# EAGLE board source_eagle (EAGLE 9.6.2)
REV: A
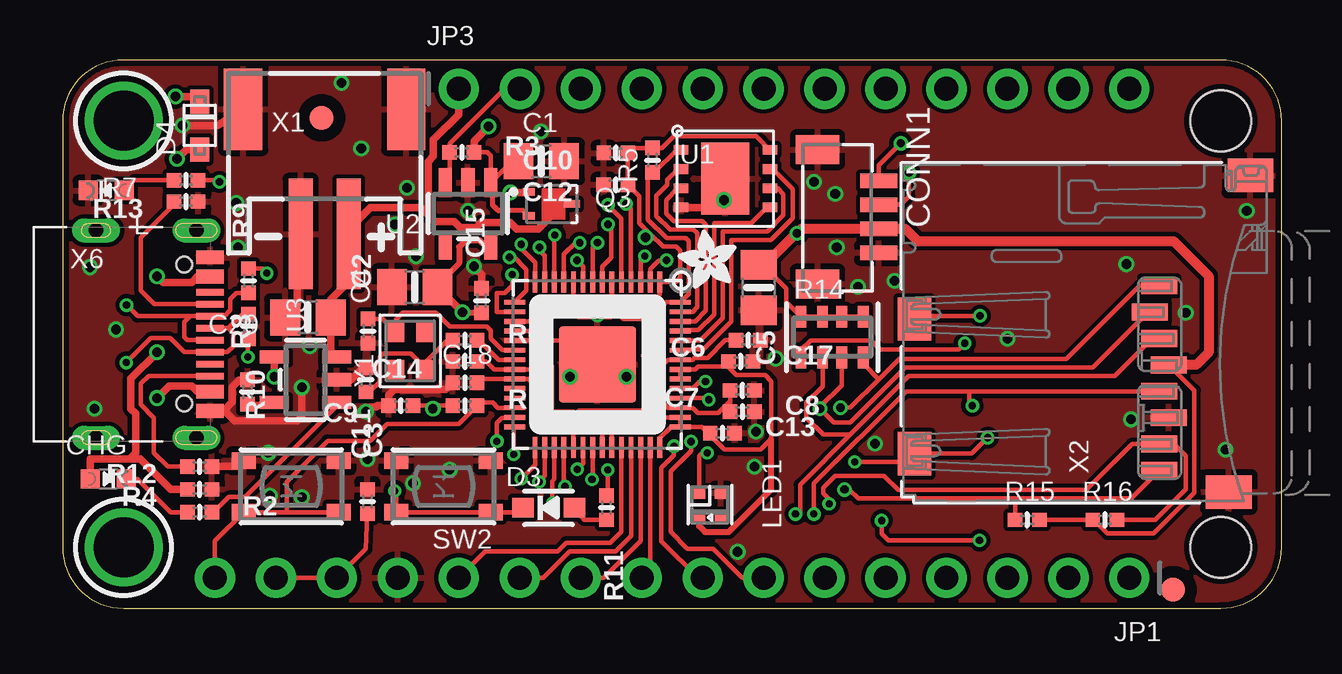
[diagram p0: board, top side]
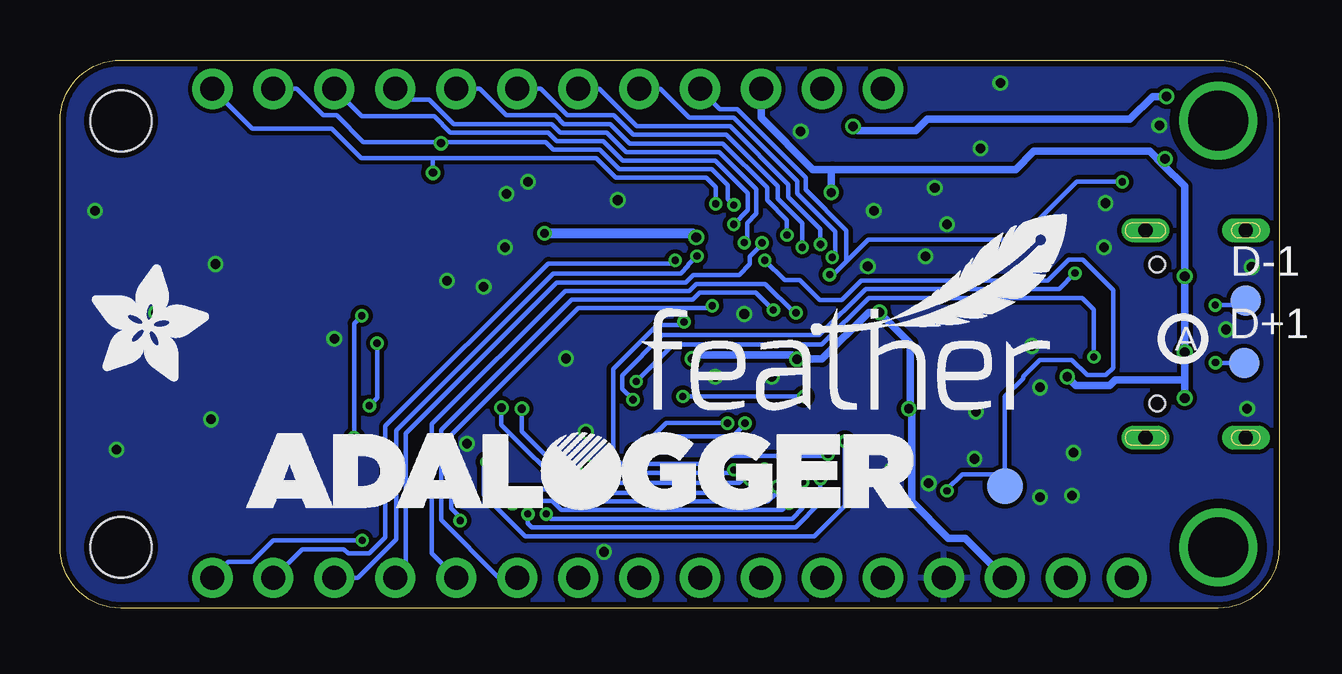
[diagram p1: board, bottom side, seen from below]

Size 50.8 x 22.86 mm. Coordinates in mm from the lower left corner, seen from the top.
Outline: 2.54,0 48.26,0 arc90 50.8,2.54 50.8,20.32 arc90 48.26,22.86 2.54,22.86 arc90 0,20.32 0,2.54 arc90 2.54,0
Copper layers (1*16): Top 0.035mm / dielectric 1.5mm / Bottom 0.035mm
Design rules "adafruit 7-7 *": minimum track width 7mil, minimum drill 8mil, track to track 7mil, track to pad 7mil, pad to pad 7mil, via to via 7mil, smd to smd 7mil, copper to edge 10mil, drill to drill 8mil, minimum pad ring 7mil, minimum via ring 5mil, stop-mask expansion 2mil, vias tented up to drill 20mil, thermal gap 10mil
Net classes: 1 power: width 0.305 mm; 2 lowpower: width 0.254 mm, drill 0.381 mm
Holes 2.54 mm at 48.26,20.32 48.26,2.54

## Footprints (pad centres in the part's own frame; a part is rotated, then mirrored left to right if it is on the bottom)
0805-NO = smd 1.24 x 1.5: 1 -0.95,0; 2 0.95,0
_0402NO = smd 0.6 x 0.6: 1 -0.508,0; 2 0.508,0
CHIPLED_0603_NOOUTLINE = smd 0.8 x 0.8: A 0,-0.75; C 0,0.75
JST_SH4_RA = smd 0.6 x 1.55: 1 1.5,0.924; 2 0.5,0.924; 3 -0.5,0.924; 4 -1.5,0.924 | smd 1.2 x 1.8: MT1 -2.8,-1.624; MT2 2.8,-1.624
SOD-323_MINI = smd 0.9 x 0.8: A 1.07,0; C -1.07,0
SOD-323F = smd 1 x 0.8: A -1,0; C 1,0
B1,27 = smd 1.27 x 1.27: TP 0,0
QFN56_7MM_REDUCEDEPAD = smd 0.875 x 0.2: 1 -3.45,2.6; 2 -3.45,2.2; 3 -3.45,1.8; 4 -3.45,1.4; 5 -3.45,1; 6 -3.45,0.6; 7 -3.45,0.2; 8 -3.45,-0.2; 9 -3.45,-0.6; 10 -3.45,-1; 11 -3.45,-1.4; 12 -3.45,-1.8; 13 -3.45,-2.2; 14 -3.45,-2.6; 29 3.45,-2.6; 30 3.45,-2.2; 31 3.45,-1.8; 32 3.45,-1.4; 33 3.45,-1; 34 3.45,-0.6; 35 3.45,-0.2; 36 3.45,0.2; 37 3.45,0.6; 38 3.45,1; 39 3.45,1.4; 40 3.45,1.8; 41 3.45,2.2; 42 3.45,2.6 | smd 0.2 x 0.875: 15 -2.6,-3.45; 16 -2.2,-3.45; 17 -1.8,-3.45; 18 -1.4,-3.45; 19 -1,-3.45; 20 -0.6,-3.45; 21 -0.2,-3.45; 22 0.2,-3.45; 23 0.6,-3.45; 24 1,-3.45; 25 1.4,-3.45; 26 1.8,-3.45; 27 2.2,-3.45; 28 2.6,-3.45; 43 2.6,3.45; 44 2.2,3.45; 45 1.8,3.45; 46 1.4,3.45; 47 1,3.45; 48 0.6,3.45; 49 0.2,3.45; 50 -0.2,3.45; 51 -0.6,3.45; 52 -1,3.45; 53 -1.4,3.45; 54 -1.8,3.45; 55 -2.2,3.45; 56 -2.6,3.45 | smd 3.2 x 3.2: P$1 0,0
1X16_ROUND = drill 1 pad 1.676: 1 -19.05,0; 2 -16.51,0; 3 -13.97,0; 4 -11.43,0; 5 -8.89,0; 6 -6.35,0; 7 -3.81,0; 8 -1.27,0; 9 1.27,0; 10 3.81,0; 11 6.35,0; 12 8.89,0; 13 11.43,0; 14 13.97,0; 15 16.51,0; 16 19.05,0
1X12_ROUND = drill 1 pad 1.676: 1 -13.97,0; 2 -11.43,0; 3 -8.89,0; 4 -6.35,0; 5 -3.81,0; 6 -1.27,0; 7 1.27,0; 8 3.81,0; 9 6.35,0; 10 8.89,0; 11 11.43,0; 12 13.97,0
SK6805_1515 = smd 0.5 x 0.5: 1 -0.5,-0.45; 2 0.5,-0.45; 3 0.5,0.45; 4 -0.5,0.45
DFN2015-3 = smd 0.5 x 0.31: 1 -0.95,0.5; 2 -0.95,-0.5 | smd 0.65 x 0.31: 3 0.825,0
RESPACK_4X0603 = smd 0.45 x 0.9: 1 -1.3,-0.85; 2 -0.4,-0.85; 3 0.4,-0.85; 4 1.3,-0.85; 5 1.3,0.85; 6 0.4,0.85; 7 -0.4,0.85; 8 -1.3,0.85
BTN_RKB2_4.6X2.8 = smd 1 x 0.7: A 1.973,1.075; A' -1.973,1.075; B 1.973,-1.075; B' -1.973,-1.075
TESTPOINT_ROUND_1.5MM_NO = smd 1.5 x 1.5: P$1 0,0
USON8_4X4 = smd 0.6 x 0.4: 1 -1.85,1.2; 2 -1.85,0.4; 3 -1.85,-0.4; 4 -1.85,-1.2; 5 1.85,-1.2; 6 1.85,-0.4; 7 1.85,0.4; 8 1.85,1.2 | smd 2 x 3: PAD 0,0
SOT23-5 = smd 0.55 x 1.2: 1 -0.95,-1.3; 2 0,-1.3; 3 0.95,-1.3; 4 0.95,1.3; 5 -0.95,1.3
MOUNTINGHOLE_2.5_PLATED = drill 2.5 pad 3.2: P$1 0,0
FIDUCIAL_1MM = smd 1 x 1: 1 0,0
JSTPH2_BATT = smd 1 x 4.6: 1 -1,-2.303; 2 1,-2.303 | smd 1.6 x 3.4: NC1 -3.4,2.897; NC2 3.4,2.897
MICROSD = smd 0.7 x 1.5: 1 1.761,-3.147; 2 0.661,-2.747; 3 -0.439,-3.147; 4 -1.539,-3.547; 5 -2.639,-3.147; 6 -3.739,-3.547; 7 -4.839,-3.147; 8 -5.939,-3.147 | smd 1.8 x 1.4: CD1 -5.239,7.053; CD2 0.38,7.053 | smd 1.4 x 1.9: MT1 -6.839,-6.047; MT2 6.361,-6.947
USB_C_CUSB31-CFM2AX-01-X = smd 0.575 x 1.15: A1B12 -3.2,2.275; A4B9 -2.4,2.275; B1A12 3.2,2.275; B4A9 2.4,2.275 | smd 0.275 x 1.15: A5 -1.25,2.275; A6 -0.25,2.275; A7 0.25,2.275; A8 1.25,2.275; B5 1.75,2.275; B6 0.75,2.275; B7 -0.75,2.275; B8 -1.75,2.275 | drill 0.6 pad 1 long: M1 -4.32,1.7; M2 4.32,1.7; M3 -4.32,-2.48; M4 4.32,-2.48 | hole 0.65: 2.89,1.2; -2.89,1.2
CRYSTAL_2.5X2 = smd 0.9 x 0.75: 1 -0.825,-0.625; 2 0.825,-0.625; 3 0.825,0.625; 4 -0.825,0.625

## Placement (x,y rotation side)
C1  10uF/16V  [0805-NO]  19.94,18.63 0 top
C2  22pF  [_0402NO]  12.73,11.56 90 top
C3  22pF  [_0402NO]  12.64,9.53 270 top
C4  10uF/16V  [0805-NO]  14.67,13.38 180 top
C5  10uF/16V  [0805-NO]  29.01,13.37 270 top
C6  0.1uF  [_0402NO]  28.57,11.18 180 top
C7  0.1uF  [_0402NO]  28.32,9.08 180 top
C8  1uF/25V  [_0402NO]  28.32,8.19 0 top
C9  0.1uF  [_0402NO]  14.1,8.45 180 top
C10  1uF/25V  [_0402NO]  23.06,18.98 180 top
C11  1uF/25V  [_0402NO]  12.7,4.45 90 top
C12  0.1uF  [_0402NO]  23.05,17.65 180 top
C13  0.1uF  [_0402NO]  27.5,7.3 0 top
C14  0.1uF  [_0402NO]  16.76,10.29 180 top
C15  1uF/25V  [_0402NO]  17.46,12.83 90 top
C17  1uF/25V  [_0402NO]  28.26,10.29 0 top
C18  0.1uF  [_0402NO]  16.76,9.4 0 top
C20  10uF/16V  [0805-NO]  10.22,12.13 180 top
CHG  ORANGE  [CHIPLED_0603_NOOUTLINE]  1.91,5.4 270 top
CONN1  STEMMA_I2C_QTRA  [JST_SH4_RA]  33.08,16.32 270 top
D3  1N5819  [SOD-323_MINI]  20.26,4.19 0 top
D4  PMEG2020AEA  [SOD-323F]  5.71,20.13 90 top
D+1  TPB1,27  [B1,27]  1.46,10.22 0 bottom
D-1  TPB1,27  [B1,27]  1.4,12.83 0 bottom
IC1  RP2040_QFN56  [QFN56_7MM_REDUCEDEPAD]  22.29,10.16 270 top
JP1  [1X16_ROUND]  25.4,1.27 180 top
JP3  [1X12_ROUND]  30.48,21.65 0 top
L  RED  [CHIPLED_0603_NOOUTLINE]  1.82,17.42 90 top
LED1  WS2812B_SK6805_1515  [SK6805_1515]  26.97,4.32 270 top
PLABEL62  [PLABEL62]  35.31,10.22 0 bottom
PLABEL63  [PLABEL63]  16.07,7.37 0 top
PLABEL64  [PLABEL64]  9.78,7.37 0 top
PLABEL65  [PLABEL65]  3.8,5.51 90 top
PLABEL66  [PLABEL66]  3.61,17.2 90 top
PLABEL67  [PLABEL67]  6.16,2.86 0 top
PLABEL68  [PLABEL68]  13.84,2.79 0 top
PLABEL69  [PLABEL69]  16.7,2.79 0 top
PLABEL70  [PLABEL70]  19.05,2.79 0 top
PLABEL71  [PLABEL71]  21.59,2.79 0 top
PLABEL72  [PLABEL72]  24.13,2.79 0 top
PLABEL73  [PLABEL73]  26.67,2.79 0 top
PLABEL74  [PLABEL74]  29.21,2.79 0 top
PLABEL75  [PLABEL75]  27.81,20.51 0 top
PLABEL76  [PLABEL76]  24.13,20.13 0 top
PLABEL77  [PLABEL77]  21.59,20.13 0 top
PLABEL78  [PLABEL78]  18.92,20.13 0 top
PLABEL79  [PLABEL79]  16.32,20.19 0 top
PLABEL80  [PLABEL80]  10.29,2.79 0 top
PLABEL81  [PLABEL81]  30.23,15.56 90 top
PLABEL82  [PLABEL82]  31.62,2.79 0 top
PLABEL83  [PLABEL83]  34.48,2.79 0 top
PLABEL84  [PLABEL84]  36.83,2.79 0 top
PLABEL85  [PLABEL85]  39.37,2.79 0 top
PLABEL86  [PLABEL86]  41.91,2.79 0 top
PLABEL87  [PLABEL87]  44.39,2.79 0 top
PLABEL88  [PLABEL88]  34.29,20.13 0 top
PLABEL89  [PLABEL89]  36.83,20.13 0 top
PLABEL90  [PLABEL90]  39.37,20.13 0 top
PLABEL91  [PLABEL91]  41.91,20.13 0 top
PLABEL92  [PLABEL92]  45.34,20.13 0 top
PLABEL93  [PLABEL93]  30.29,20.38 0 top
PLABEL94  [PLABEL94]  32.64,20.32 0 top
PLABEL95  [PLABEL95]  34.8,6.6 0 top
PLABEL96  [PLABEL96]  31.75,2.86 0 bottom
PLABEL97  [PLABEL97]  34.48,2.86 0 bottom
PLABEL98  [PLABEL98]  37.02,2.86 0 bottom
PLABEL99  [PLABEL99]  39.37,2.86 0 bottom
PLABEL100  [PLABEL100]  41.91,2.86 0 bottom
PLABEL101  [PLABEL101]  41.78,20.07 0 bottom
PLABEL102  [PLABEL102]  44.96,20.07 0 bottom
PLABEL103  [PLABEL103]  39.37,20.07 0 bottom
PLABEL104  [PLABEL104]  36.83,20.07 0 bottom
PLABEL105  [PLABEL105]  34.29,20.07 0 bottom
PLABEL106  [PLABEL106]  31.75,20.13 0 bottom
PLABEL107  [PLABEL107]  6.29,2.86 0 bottom
PLABEL108  [PLABEL108]  13.84,2.86 0 bottom
PLABEL109  [PLABEL109]  16.76,2.86 0 bottom
PLABEL110  [PLABEL110]  18.86,2.86 0 bottom
PLABEL111  [PLABEL111]  21.65,2.86 0 bottom
PLABEL112  [PLABEL112]  24.07,2.86 0 bottom
PLABEL113  [PLABEL113]  26.61,2.86 0 bottom
PLABEL114  [PLABEL114]  29.15,2.86 0 bottom
PLABEL115  [PLABEL115]  9.97,2.86 0 bottom
PLABEL116  [PLABEL116]  26.67,20.07 0 bottom
PLABEL117  [PLABEL117]  24.19,20.07 0 bottom
PLABEL118  [PLABEL118]  21.53,20.07 0 bottom
PLABEL119  [PLABEL119]  18.99,20.07 0 bottom
PLABEL120  [PLABEL120]  16.38,20.07 0 bottom
PLABEL121  [PLABEL121]  29.21,20.07 0 bottom
PLABEL122  [PLABEL122]  9.53,19.81 0 bottom
PLABEL123  [PLABEL123]  44.58,2.86 0 bottom
PLABEL124  [PLABEL124]  41.91,13.02 0 bottom
Q3  DMG3415UFY  [DFN2015-3]  20.38,16.85 0 top
R1  10K  [_0402NO]  16.76,8.45 0 top
R2  10K  [_0402NO]  5.71,4 0 top
R3  10K  [_0402NO]  16.64,19.01 0 top
R4  10K  [_0402NO]  5.71,4.95 180 top
R5  10K  [_0402NO]  24.59,18.68 90 top
R6  1K  [_0402NO]  16.76,11.18 0 top
R7  10K  [_0402NO]  5.14,17.84 180 top
R8  5.1K  [_0402NO]  7.71,9.02 90 top
R9  22 ohm  [_0402NO]  7.75,13.65 90 top
R10  22 ohm  [_0402NO]  7.75,11.75 270 top
R11  1K  [_0402NO]  22.67,4.19 270 top
R12  5.1K  [_0402NO]  5.71,5.91 180 top
R13  5.1K  [_0402NO]  5.14,16.95 180 top
R14  47K  [RESPACK_4X0603]  32.07,11.3 0 top
R15  47K  [_0402NO]  40.2,3.68 0 top
R16  47K  [_0402NO]  43.43,3.68 0 top
SW1  RKB2  [BTN_RKB2_4.6X2.8]  9.53,5.08 180 top
SW2  RKB2  [BTN_RKB2_4.6X2.8]  15.88,5.08 180 top
TP3  [TESTPOINT_ROUND_1.5MM_NO]  11.43,5.08 0 bottom
U1  8MB QSPI  [USON8_4X4]  27.62,17.91 0 top
U2  RT9080-3.3  [SOT23-5]  16.89,16.45 180 top
U3  MCP73831T-2ACI/OT  [SOT23-5]  10.12,9.53 90 top
U$13  [PCBFEAT-REV-040]  4,11.24 0 bottom
U$28  [ADALOGGER_LOGO]  43.05,4.06 0 bottom
U$31  MOUNTINGHOLE2.5  [MOUNTINGHOLE_2.5_PLATED]  2.54,20.32 270 top
U$32  MOUNTINGHOLE2.5  [MOUNTINGHOLE_2.5_PLATED]  2.54,2.54 270 top
U$34  FIDUCIAL_1MM  [FIDUCIAL_1MM]  10.79,20.45 270 top
U$35  FIDUCIAL_1MM  [FIDUCIAL_1MM]  46.28,0.77 270 top
U$43  [ADAFRUIT_2.5MM]  28.07,13.34 90 top
U$46  [FEATHERLOGO_MED]  26.67,8.19 0 bottom
U$47  [ADAFRUIT_5MM]  49.47,9.46 0 bottom
X1  JSTPH  [JSTPH2_BATT]  10.92,17.91 0 top
X2  MicroSD  [MICROSD]  42.55,11.68 90 top
X6  USB Type C  [USB_C_CUSB31-CFM2AX-01-X]  3.87,11.43 270 top
Y1  12MHz/12pF  [CRYSTAL_2.5X2]  14.48,10.73 90 top

## Library data of the parts
C1-C3 C5-C15 C17 C18 C20 D3 JP1 JP3 R1-R16 TP3 U1 U$43 U$47 Y1 = microbuilder
C4 = microbuilder; COMPANY: ADAFRUIT INDUSTRIES; DRAWN: KTOWN; REV: A
CHG L = microbuilder; ROT: 270
CONN1 = adafruit_electromech; LCSC: C145961
D4 = adafruit
D+1 D-1 = testpad
IC1 = adafruit_micro; LCSC: C2040
LED1 = microbuilder; LCSC: C2890035
PLABEL62-PLABEL124 = pinguin
Q3 = microbuilder; ROT: 180
SW1 SW2 = adafruit_electromech
U2 = adafruit_power; JLC_ROTATION: 0
U3 = microbuilder; JLC_ROTATION: 0; LCSC: C424093
U$13 = microbuilder; REV: A
U$28 = silks
U$31 U$32 = adafruit_electromech; BOM: EXCLUDE
U$34 U$35 = microbuilder; BOM: EXCLUDE
U$46 = feather_silks
X1 = adafruit_electromech; LCSC: C47647
X2 = adafruit_electromech; JLC_ROTATION: 90; LCSC: C125617
X6 = adafruit_electromech; LCSC: C165948

## Nets
1.2V: C6.2 C7.2 C8.1 C18.2 IC1.23 IC1.45 IC1.50
!RESET: IC1.26 JP1.16 R1.2 SW1.A SW1.A'
+3V3: C4.1 C5.1 C9.1 C10.1 C11.1 C12.1 C13.1 C14.1 C15.1 C17.1 CONN1.2 IC1.1 IC1.10 IC1.22 IC1.33 IC1.42 IC1.43 IC1.44 IC1.48 IC1.49 JP1.14 JP1.15 LED1.2 R1.1 R5.2 R14.5 R14.6 R14.7 R14.8 R15.2 R16.1 U1.8 U2.5 X2.4
A0: IC1.38 JP1.12
A1: IC1.39 JP1.11
A2: IC1.40 JP1.10
A3: IC1.41 JP1.9
CARD_DET: IC1.27 X2.CD1 X2.CD2
CC1: R13.2 X6.A5
CC2: R12.2 X6.B5
CMD/MOSI: IC1.30 R14.2 X2.3
D4: IC1.6 JP1.1
D5: IC1.7 JP3.10
D6: IC1.8 JP3.9
D9: IC1.12 JP3.8
D10: IC1.13 JP3.7
D11: IC1.14 JP3.6
D12: IC1.15 JP3.5
D13: IC1.16 JP3.4 R7.1
D24: IC1.36 JP1.8
D25: IC1.37 JP1.7
D+: IC1.47 R10.2
D-: IC1.46 R9.2
DAT0/MISO: IC1.31 R16.2 X2.7
DAT1: IC1.32 R15.1 X2.8
DAT2: IC1.34 R14.4 X2.1
DAT3/CS: IC1.35 R14.3 X2.2
EN: JP3.2 R3.1 U2.3
GND [power]: C1.2 C2.1 C3.1 C4.2 C5.2 C6.1 C7.1 C8.2 C9.2 C10.2 C11.2 C12.2 C13.2 C14.2 C15.2 C17.2 C18.1 C20.2 CONN1.1 CONN1.MT1 CONN1.MT2 IC1.19 IC1.P$1 JP1.13 L.C LED1.4 R4.1 R8.2 R12.1 R13.1 SW1.B SW1.B' SW2.B SW2.B' U1.4 U1.PAD U2.2 U3.2 X1.1 X1.NC1 X1.NC2 X2.6 X2.MT1 X2.MT2 X6.A1B12 X6.B1A12
MISO: IC1.11 JP1.4
MOSI: IC1.18 JP1.5
N$1: CHG.C R2.1
N$2: L.A R7.2
N$3: R2.2 U3.1
N$4: R8.1 U3.5
N$5: C2.2 IC1.20 Y1.3
N$6: C3.2 R6.1 Y1.1
N$7: IC1.21 R6.2
N$16: D3.A R11.2
NEOPIXEL: IC1.28 LED1.1
QSPI_CS: IC1.56 R5.1 R11.1 U1.1
QSPI_DATA[0]: IC1.53 U1.5
QSPI_DATA[1]: IC1.55 U1.2
QSPI_DATA[2]: IC1.54 U1.3
QSPI_DATA[3]: IC1.51 U1.7
QSPI_SCK: IC1.52 U1.6
RX: IC1.3 JP1.3
SCK: IC1.17 JP1.6
SCL: CONN1.4 IC1.5 JP3.11
SD_CLK: IC1.29 R14.1 X2.5
SDA: CONN1.3 IC1.4 JP3.12
SWCLK: IC1.24
SWDIO: IC1.25
TX: IC1.2 JP1.2
USB_D+: D+1.TP R10.1 X6.A6 X6.B6
USB_D-: D-1.TP R9.1 X6.A7 X6.B7
USBBOOT: D3.C IC1.9 SW2.A SW2.A' TP3.P$1
VBAT [power]: C20.1 JP3.1 Q3.3 U3.3 X1.2
VBUS [power]: CHG.A D4.A JP3.3 Q3.1 R4.2 U3.4 X6.A4B9 X6.B4A9
VHI: C1.1 D4.C Q3.2 R3.2 U2.1

## Tracks (layer width: path | path; a pad name or v marks a point on that pad's centre or on a via)
1.2V  (via drill 0.3)
  Top 0.178: C18.2 17.43,9.56 IC1.23 19.4,9.56 19.97,8.98 v19.81,8.83 | C6.2 27.62,11.18 26.88,10.44 26.33,10.44 26.25,10.36 IC1.50 25.22,10.36 25.02,10.16 25.02,8.76 | 25.02,8.76 25.02,8.57 25.03,8.56 25.03,8.55 25.22,8.36 IC1.45 26.25,8.36 26.44,8.17 26.44,8.16 26.47,8.14 27.32,8.14 27.81,8.64 C7.2 C8.1 | v24.85,8.83 24.96,8.83 25.02,8.76
  Bottom 0.178: v24.85,8.83 v19.81,8.83
!RESET
  Top 0.178: IC1.26 18.14,8.36 17.92,8.58 17.41,8.58 R1.2 16.51,7.68 13.53,7.68 12.83,6.99 11.05,6.99 9.34,5.27 9.34,4 | 9.34,4 SW1.A 6.35,2.8 JP1.16 | 9.34,4 SW1.A'
+3V3  (via drill 0.35, 0.38, 0.39, 0.4)
  Top 0.178: C14.1 17.65,10.29 17.98,9.96 IC1.22 19.68,9.96 v20.1,10.38 20.38,10.1 20.38,8.26 20.43,8.21 21.29,8.21 21.29,8.02 | IC1.48 IC1.49 26.36,9.96 26.48,10.08 27.55,10.08 C17.1 27.75,10.03 28.07,9.72 29.27,9.72 29.53,9.46 29.53,7.05 29.1,6.62 27.57,6.62 26.94,7.25 | IC1.43 IC1.44 24.98,7.96 24.68,8.26 24.26,8.26 | 26.94,7.25 26.63,7.56 IC1.43 | IC1.42 24.89,7.09 25.36,7.56 IC1.43 | U1.8 28.89,19.68 25.46,19.68 24.97,19.19 R5.2 23.78,19.19 C10.1 23.56,18.97 C12.1 24.03,17.18 24.03,16.07 24.49,15.6 | C11.1 12.63,2.47 JP1.14 JP1.15 | IC1.33 21.29,8.02 | 24.26,8.26 21.53,8.26 21.29,8.02 | 24.26,8.26 24.26,10.54 24.26,12.06 | 24.26,12.06 24.26,12.45 24.89,13.08 IC1.1 25.56,13.61 25.73,13.78 25.73,14.92 25.58,15.07 25.02,15.07 24.49,15.6 | 24.26,12.06 23.37,12.06 22.56,12.87 21.45,12.87 21.29,13.04 IC1.10 | U2.5 17.78,15.21 | C9.1 15.43,8.45 v15.43,8.32 15.56,8.45 R1.1 | 26.94,7.25 C13.1 | 24.49,15.6 24.36,15.47 v24.29,15.47 | R14.5 R14.6 R14.7 R14.8 30.16,12.76 30.16,13.34 29.17,14.32 C5.1 | R15.2 R16.1 42.97,3.68 43.53,3.12 45.47,3.12 47.16,4.81 47.16,9.08 X2.4
  Top 0.254: 17.78,15.21 17.51,15.21 17.39,15.34 16.8,15.34 16.52,15.06 16.52,14.38 15.62,13.48 | v16.66,12.33 17.45,12.33 C15.1 | LED1.2 26.52,3.43 26.78,3.17 27.75,3.17 29.53,4.95 29.53,7.05
  Top 0.305: v16.66,12.33 16.66,12.34 C4.1 15.62,13.48 | v24.45,10.4 24.31,10.54 24.26,10.54
  Top 0.406: C5.1 29.01,14.53 29.21,14.73 29.65,14.73 30.55,15.63 v30.61,15.63 30.8,15.82 CONN1.2 35.11,15.82 35.62,15.3 46.29,15.3 47.75,13.84 47.75,10.67 47.23,10.14 X2.4
  Bottom 0.305: JP1.14 13.08,2.92 13.78,2.92 15.3,4.45 15.3,8.19 v15.43,8.32 15.37,8.38 15.37,11.04 v16.66,12.33 17.11,12.33 19.06,10.38 v20.1,10.38 20.28,10.57 24.32,10.57 24.45,10.44 v24.45,10.4
  Bottom 0.406: v24.29,15.47 24.45,15.63 v30.61,15.63
A0
  Top 0.178: IC1.38 23.29,3.19 22.83,2.73 20.98,2.73 20.63,2.38 17.61,2.38 JP1.12
A1
  Top 0.178: IC1.39 23.69,3.02 23.04,2.38 21.13,2.38 20.03,1.27 JP1.11
A2
  Top 0.178: JP1.10 22.54,1.27 24.09,2.82 IC1.40
A3
  Top 0.178: IC1.41 24.49,1.63 JP1.9
CARD_DET  (via drill 0.3)
  Top 0.178: IC1.27 18.8,7.93 18.29,7.93 18.1,7.73 v18.1,6.96 | v33.01,6.1 35.14,6.1 X2.CD1 37.88,6.45 v38.54,7.11 | X2.CD2 35.62,12.19 v38.23,12.19
  Bottom 0.178: v18.1,6.96 18.1,4.26 19.37,2.98 31.41,2.98 33.14,4.72 33.14,6.1 v33.01,6.1 | v38.23,12.19 38.54,11.87 v38.54,7.11
CC1
  Top 0.178: X6.A5 3.83,12.68 3.27,13.24 3.27,15.46 4.64,16.83 R13.2
CC2
  Top 0.178: R12.2 4.38,5.91 3.81,6.48 3.81,7.94 3.27,8.49 3.27,9.36 3.6,9.69 5.55,9.69 5.56,9.68 X6.B5
CMD/MOSI  (via drill 0.3)
  Top 0.178: IC1.30 20.09,5.51 v19.85,5.27 | v30.54,3.93 30.67,3.93 30.73,3.99 30.73,5.14 32.83,7.24 | X2.3 45.4,11.24 43.84,9.68 35.27,9.68 32.83,7.24 | 32.83,7.24 31.69,7.24 30.99,7.93 30.99,8.57 31.67,9.25 R14.2
  Bottom 0.178: v19.85,5.27 19.88,5.24 19.88,4.16 20.3,3.73 30.35,3.73 v30.54,3.93
D4  (via drill 0.3)
  Top 0.178: IC1.6 22.89,13.09 23.37,12.61 v23.62,12.61 | v38.21,2.83 34.4,2.83 34.13,3.1 v34.13,3.65
  Bottom 0.178: v23.62,12.61 23.71,12.52 29.21,12.52 34.51,7.22 34.51,4.16 34.13,3.78 v34.13,3.65 | v38.21,2.83 38.21,2.82 41.92,2.82 42.82,1.92 43.8,1.92 JP1.1
D5  (via drill 0.3)
  Top 0.178: v22.73,16 22.87,15.86 22.87,14.63 22.49,14.24 IC1.7
  Bottom 0.178: v22.73,16 22.14,16.59 22.14,17.31 23.5,18.67 27.35,18.67 28.16,19.48 30.11,19.48 30.46,19.84 34.54,19.84 35.21,20.51 38.23,20.51 JP3.10
D6  (via drill 0.3)
  Top 0.178: v22.29,15.24 22.09,15.04 IC1.8
  Bottom 0.178: v22.29,15.24 22.23,15.24 22.16,15.3 22.16,16.07 21.78,16.45 21.78,17.47 23.33,19.02 27.2,19.02 28.01,19.84 29.96,19.84 30.32,20.19 34.39,20.19 35.41,21.21 36.39,21.21 JP3.9
D9  (via drill 0.3)
  Top 0.178: v20.51,15.56 20.49,15.54 IC1.12
  Bottom 0.178: v20.51,15.56 20.51,16.19 21.34,17.02 21.34,17.53 21.33,17.53 23.18,19.38 27.05,19.38 27.87,20.19 29.82,20.19 30.17,20.55 32.21,20.55 33.31,21.65 JP3.8
D10  (via drill 0.3)
  Top 0.178: IC1.13 20.09,14.71 19.88,14.92 v19.88,15.05
  Bottom 0.178: v19.88,15.05 19.88,16.07 20.89,17.08 20.89,17.59 23.04,19.74 26.91,19.74 27.72,20.55 29.67,20.55 30.77,21.65 JP3.7
D11  (via drill 0.3)
  Top 0.178: IC1.14 19.69,14.41 19.11,14.99 v19.11,15.18
  Bottom 0.178: v19.11,15.18 19.11,15.81 20.45,17.14 20.45,17.66 22.88,20.09 26.76,20.09 28.32,21.65 JP3.6
D12  (via drill 0.3)
  Top 0.178: IC1.15 19.32,13.24 19.32,14.12 18.81,14.63 v18.62,14.63
  Bottom 0.178: v18.62,14.63 18.5,14.76 18.5,15.7 20.09,17.3 20.09,17.8 22.73,20.45 24.57,20.45 25.78,21.65 JP3.5
D13  (via drill 0.3)
  Top 0.178: IC1.16 18.1,12.36 18.1,13.14 18.41,13.14 18.73,13.46 v18.73,13.91 | R7.1 6.48,17.84 v6.54,17.78
  Bottom 0.178: v6.54,17.78 8.45,17.78 10.86,15.37 17.12,15.37 18.03,14.45 | v18.73,13.91 18.58,13.91 18.03,14.45 | JP3.4 24.13,21.63 23.3,20.8 22.59,20.8 19.74,17.95 19.74,17.45 18.03,15.75 18.03,14.45
D24  (via drill 0.3)
  Top 0.178: IC1.36 22.49,7.44 22.44,7.49 22.44,7.52 v22.25,7.71 | v25.48,6.75 25.48,6.37 24.96,5.85 24.96,2.79 26.48,1.27 JP1.8
  Bottom 0.178: v22.25,7.71 22.44,7.52 22.44,7.49 22.76,7.17 25.06,7.17 v25.48,6.75
D25  (via drill 0.3)
  Top 0.178: IC1.37 22.89,7.61 v22.99,7.71 | v26.19,6.95 26.19,6.55 25.34,5.7 25.34,3.17 26.04,2.48 27.11,2.48 28.32,1.27 JP1.7
  Bottom 0.178: v26.19,6.95 26.19,7.07 25.54,7.72 23,7.72 v22.99,7.71
D+  (via drill 0.3)
  Top 0.178: IC1.47 25.77,9.19 26.29,9.19 26.55,9.45 v26.79,9.45 | v7.72,10.48 7.72,11.21 R10.2
  Bottom 0.178: v26.79,9.45 25.26,10.99 19.05,10.99 17.1,12.94 8.21,12.94 7.72,12.45 v7.72,10.48
D-  (via drill 0.3)
  Top 0.178: IC1.46 26.86,8.76 v26.92,8.69 | v8.51,13.97 8.32,14.16 R9.2
  Bottom 0.178: v26.92,8.69 27.37,9.14 27.37,9.71 25.7,11.38 19.16,11.38 17.23,13.31 9.17,13.31 v8.51,13.97
DAT0/MISO  (via drill 0.3)
  Top 0.178: v20.42,4.38 20.39,4.41 20.39,5.3 20.49,5.39 IC1.31 | v31.94,4.35 31.94,4.54 31.69,4.79 31.69,5.02 32.19,5.52 34.23,5.52 34.82,4.93 42.65,4.93 44.56,6.84 45.4,6.84 X2.7 46.3,6.84 46.8,6.35 46.8,4.95 45.53,3.68 R16.2
  Bottom 0.178: v20.42,4.38 20.71,4.09 29.91,4.09 30.29,4.47 31.81,4.47 v31.94,4.35
DAT1  (via drill 0.3, 0.35)
  Top 0.178: IC1.32 20.89,5.12 v20.94,5.07 | 39.56,4.57 44.52,4.57 X2.8 | 39.56,4.57 33.15,4.57 32.77,4.95 v32.58,4.95 | R15.1 39.69,4.45 39.56,4.57
  Bottom 0.178: v20.94,5.07 20.94,4.82 21.31,4.45 29.72,4.45 30.23,4.95 v32.58,4.95
DAT2  (via drill 0.3, 0.35)
  Top 0.178: IC1.34 21.69,6.04 v21.44,5.79 | v32.41,8.36 32.83,8.36 34.02,9.55 | X2.1 44.88,13.45 41.82,10.39 34.86,10.39 34.02,9.55 | 34.02,9.55 33.37,10.19 R14.4
  Bottom 0.178: v21.44,5.79 21.51,5.73 21.51,5.06 21.76,4.8 29.57,4.8 32.41,7.64 v32.41,8.36
DAT3/CS  (via drill 0.3, 0.35)
  Top 0.178: IC1.35 22.09,5.4 v22.06,5.37 | X2.2 45.24,12.35 42.93,10.03 35.12,10.03 32.83,7.75 32.13,7.75 v31.56,8.32 31.56,8.38 32.47,9.29 R14.3
  Bottom 0.178: v22.06,5.37 22.35,5.37 22.5,5.22 29.42,5.22 31.56,7.37 v31.56,8.32
EN
  Top 0.178: U2.3 16.13,17.93 R3.1 16.13,19.37 18.41,21.65 JP3.2
GND  (via drill 0.4)
  Top 0.178: IC1.19 20.97,11.16 21.02,11.11
  Top 0.305: X1.NC1 6.44,20.13 v5,20.13 | C3.1 12.52,10.03 12.01,9.53 U3.2 | U1.4 27.25,16.71 v27.56,17.02 27.62,17.08 U1.PAD | C18.1 15.98,9.12 13.82,9.12 13.59,8.89 C9.2 13.13,8.45 13.07,8.39 12.83,8.39 v12.64,8.19 | C15.2 17.46,13.92 17.14,14.24 v17.14,14.26 | IC1.P$1 21.65,10.16 v21.14,9.65 | R12.1 7.3,5.91 SW1.B | R8.2 7.37,9.53 7.07,9.23 7.07,8.6 6.71,8.23 | X6.B1A12 6.71,8.23 | 6.71,8.23 6.76,8.23 7.18,7.81 9.78,7.81 9.97,8 v9.97,9.21 | C20.2 9.78,12.63 9.78,14.96 9.92,15.1 X1.1
  Top 0.406: 21.02,11.11 20.95,11.11 21.46,10.6 21.84,10.6 IC1.P$1
  other vias: 11.62,21.91 8.57,6.48 9.97,4.64 12.7,6.22 16.13,5.78 23.5,9.65 28.89,7.37 13.84,16 16.89,16.57 14.73,14.67 8.64,4.7 14.61,5.21 22.29,12.27 2.22,11.62 1.33,8.32 1.14,14.22 7.24,16.89 7.3,15.05 10.3,10.93 19.94,19.88 12.45,19.18 14.35,17.53 32.26,15.05 32.19,17.27 31.31,17.78 28.83,5.91 29.72,10.41 34.67,13.65 33.15,13.4 28.13,2.35 33.85,6.86 44.51,7.87 46.8,12.32 44.32,14.35 49.34,16.57 48.45,6.6 39.37,11.24
  pour Top: 0,22.86 50.8,22.86 50.8,0 0,0
  pour Bottom: 0,22.86 50.8,22.86 50.8,0 0,0
MISO  (via drill 0.3)
  Top 0.178: v21.55,15.23 21.36,15.23 20.89,14.76 IC1.11
  Bottom 0.178: v21.55,15.23 21.55,15.17 22.06,14.66 22.06,14.34 22.5,13.9 24.41,13.9 24.72,13.59 30.1,13.59 36.4,7.29 36.4,1.27 JP1.4
MOSI  (via drill 0.3)
  Top 0.178: IC1.18 19.69,11.56 20.13,12 v20.13,12.32
  Bottom 0.178: v20.13,12.32 20.2,12.32 21.41,13.53 24.28,13.53 24.57,13.23 29.75,13.23 35.31,7.68 35.31,2.29 JP1.5
N$1
  Top 0.178: CHG.C 3.11,5.4 4.51,4 R2.1
N$2
  Top 0.178: L.A 2.99,17.84 R7.2
N$3
  Top 0.178: R2.2 6.29,4 6.92,4.64 7.62,4.64 11.42,8.44 U3.1
N$4
  Top 0.178: U3.5 8.76,8.51 R8.1
N$5
  Top 0.178: C2.2 13.35,12.06 Y1.3 13.85,12 14.17,12.32 15.56,12.32 16.13,11.74 17.68,11.74 17.84,11.59 17.84,11.24 18.32,10.76 IC1.20
N$6
  Top 0.178: R6.1 16.04,11.18 15.1,10.24 15.1,10.03 | 15.1,10.03 Y1.1 | C3.2 12.79,9.02 13.21,9.44 13.21,10.47 13.37,10.62 14.51,10.62 15.1,10.03
N$7
  Top 0.178: R6.2 17.47,10.98 17.55,10.98 18.18,10.36 IC1.21
N$16
  Top 0.178: R11.2 21.74,3.68 D3.A
NEOPIXEL  (via drill 0.3)
  Top 0.178: v26.86,6.48 26.66,6.48 26.52,6.34 LED1.1 | v18.8,6.41 18.8,7.52 IC1.28
  Bottom 0.178: v26.86,6.48 26.86,6.35 26.52,6.01 23.27,6.01 22.92,6.35 18.87,6.35 v18.8,6.41
QSPI_CS  (via drill 0.3)
  Top 0.178: 24.38,16.21 25.17,15.43 25.96,15.43 26.09,15.3 26.09,13.11 IC1.56 25.15,12.76 24.8,12.42 v24.8,11.94 | R11.1 22.72,4.75 v22.72,5.77 | 24.38,16.21 24.38,16.64 24.38,17.84 24.38,17.97 R5.1 24.65,18.17 25.58,19.11 U1.1 | 24.38,16.21
  Bottom 0.178: v22.72,5.77 22.84,5.65 27.05,5.65 27.75,6.35 27.75,9.97 25.91,11.81 24.93,11.81 v24.8,11.94
QSPI_DATA[0]
  Top 0.178: U1.5 29.35,16.71 28.7,16.07 27.17,16.07 27.15,16.05 27.15,12.26 26.49,11.59 25.77,11.59 IC1.53
QSPI_DATA[1]
  Top 0.178: U1.2 25.64,18.31 25.2,17.86 25.2,17.67 24.74,17.21 24.74,16.36 25.32,15.79 26.29,15.79 26.44,15.63 26.44,12.55 26.25,12.36 IC1.55
QSPI_DATA[2]
  Top 0.178: IC1.54 26.36,11.96 26.8,12.4 26.8,16 26.66,16.14 25.46,16.14 25.15,16.46 25.15,17.02 25.64,17.51 U1.3
QSPI_DATA[3]
  Top 0.178: U1.7 29.59,18.31 30.42,17.48 30.42,16.27 29.5,15.35 27.88,15.35 27.86,15.34 27.86,11.96 26.7,10.79 25.77,10.79 IC1.51
QSPI_SCK
  Top 0.178: U1.6 29.8,17.51 30.04,17.27 30.04,16.4 29.35,15.71 27.51,15.71 27.51,12.11 26.56,11.16 IC1.52
RX  (via drill 0.3)
  Top 0.178: IC1.3 24.09,14.51 v24.26,14.69
  Bottom 0.178: v24.26,14.69 24.62,14.32 24.62,14.28 24.94,13.96 30.24,13.96 36.8,7.4 36.8,2.87 38.39,1.27 JP1.3
SCK  (via drill 0.3)
  Top 0.178: v21.08,12.43 20.63,12.87 19.76,12.87 19.56,12.67 19.56,12.06 19.45,11.96 IC1.17
  Bottom 0.178: JP1.6 32.51,1.27 34.92,3.68 34.92,7.43 29.48,12.88 24.43,12.88 24.13,13.17 21.82,13.17 v21.08,12.43
SCL  (via drill 0.3, 0.35)
  Top 0.178: v22.72,16.81 23.29,16.25 IC1.5 | CONN1.4 34.01,18.47 v34.92,19.39
  Bottom 0.178: v22.72,16.81 22.98,17.07 22.98,17.65 23.64,18.31 27.5,18.31 28.31,19.13 30.26,19.13 30.56,19.43 34.92,19.43 | JP3.11 40.93,21.65 39.83,20.55 39.28,20.55 38.16,19.43 34.92,19.43 | v34.92,19.39 34.92,19.43
SD_CLK  (via drill 0.3)
  Top 0.178: IC1.29 19.69,5.97 v19.11,5.4 | v31.3,3.93 31.3,5.21 35.14,9.04 37.78,9.04 | 37.78,9.04 X2.5 | R14.1 30.77,10.77 31.17,11.17 33.7,11.17 34.08,10.79 37.34,10.79 v37.59,11.05 | v37.91,8.45 37.78,8.57 37.78,9.04
  Bottom 0.178: v19.11,5.4 19.11,4.42 20.15,3.38 31.14,3.38 31.3,3.55 v31.3,3.93 | v37.59,11.05 37.59,8.76 v37.91,8.45
SDA  (via drill 0.3, 0.35)
  Top 0.178: v23.48,16.86 23.67,16.67 23.67,13.63 IC1.4 | CONN1.3 34.92,16.82 35.26,17.16 v35.26,18.16
  Bottom 0.178: v23.48,16.86 23.48,17.56 23.88,17.96 27.64,17.96 28.46,18.77 35.34,18.77 | 35.34,18.77 38.24,18.77 39.47,20 42.8,20 JP3.12 | v35.26,18.16 35.26,18.7 35.34,18.77
TX  (via drill 0.3)
  Top 0.178: IC1.2 24.49,14.14 24.85,14.5 v25.16,14.5
  Bottom 0.178: v25.16,14.5 25.29,14.38 30.46,14.38 37.24,7.59 37.24,2.96 37.91,2.29 38.8,2.29 38.98,2.46 40.72,2.46 JP1.2
USB_D+  (via drill 0.3)
  Top 0.178: 6.91,11.68 7.49,12.26 R10.1 | X6.A6 6.91,11.68 | 6.91,11.68 7.11,11.48 7.11,10.92 6.87,10.68 X6.B6 5.07,10.68 4.49,11.26 3.67,11.26 v2.65,10.24
  Bottom 0.178: v2.65,10.24 2.63,10.22 D+1.TP
USB_D-  (via drill 0.3)
  Top 0.178: X6.A7 5.2,11.18 5.08,11.3 5.08,11.94 5.32,12.18 X6.B7 | X6.B7 6.18,12.15 6.71,12.15 6.99,12.43 6.99,12.89 7.24,13.14 R9.1 | X6.B7 3.12,12.18 v2.67,12.64
  Bottom 0.178: v2.67,12.64 1.59,12.64 D-1.TP
USBBOOT  (via drill 0.3)
  Top 0.178: D3.C 19.22,4 SW2.A' SW2.A 13.9,4.83 v13.84,4.89 | IC1.9 21.69,14.25 v21.43,14.51
  Bottom 0.178: v13.84,4.89 13.84,4.95 13.21,5.59 11.49,5.59 11.43,5.52 | TP3.P$1 11.43,5.52 | v21.43,14.51 20.61,13.68 19.98,13.68 19.15,12.85 18.22,12.85 17.41,13.66 9.64,13.66 8.76,14.54 8.19,14.54 6.92,13.27 6.92,10.03 7.23,9.72 8,9.72 8.64,10.35 9.97,10.35 10.67,9.65 10.67,9.59 11.43,8.83 11.43,5.52
VBAT
  Top 0.305: U3.3 11.17,10.72 C20.1 11.17,12.87 11.92,13.61 X1.2 11.92,15.8 12.83,16.7 14.92,16.7 15.23,16.4 | JP3.1 16.51,20.59 15.45,19.53 15.45,18.84 15.23,18.61 15.23,16.4 | 15.23,16.4 15.49,16.13 16.32,16.13 16.57,15.88 17.23,15.88 17.43,16.08 18.66,16.08 18.92,15.81 19.81,15.81 20.38,16.38 20.38,16.7 20.54,16.85 Q3.3
VBUS  (via drill 0.38, 0.4)
  Top 0.305: X6.A4B9 5.62,13.83 5.38,13.59 4.19,13.59 v3.94,13.84 | X6.B4A9 5.62,9.03 5.38,9.27 4.45,9.27 v3.94,8.76 | 2.79,6.22 1.16,6.22 CHG.A | 2.79,6.22 3.05,6.48 3.05,8.11 2.85,8.31 2.85,9.58 v3.94,10.67 | v4.76,18.73 5.16,19.13 D4.A | R4.2 4.51,4.95 3.24,6.22 2.79,6.22 | U3.4 v8.83,9.65 | Q3.1 19.42,17.34 v18.67,17.34
  Bottom 0.305: 3.94,9.53 v3.94,10.67 v3.94,13.84 3.94,17.59 4.83,18.48 | 3.94,9.53 v3.94,8.76 | 4.83,18.48 4.83,18.67 v4.76,18.73 | 4.83,18.48 5.4,19.05 10.22,19.05 10.99,18.29 18.61,18.29 | JP3.3 21.59,20.45 19.43,18.29 18.61,18.29 | 3.94,9.53 6.83,9.53 7.06,9.3 8.47,9.3 v8.83,9.65 | 18.61,18.29 18.67,18.22 v18.67,17.34
VHI  (via drill 0.39)
  Top 0.178: R3.2 17.69,19.01 17.84,18.86 U2.1 | 17.92,17.67 U2.1 | C1.1 18.73,18.63 U2.1
  Top 0.203: Q3.2 19.21,16.57 18.16,16.57 17.92,16.82 17.92,17.67
  Top 0.305: D4.C 5.51,21.34 v4.7,21.34 | v17.75,20.09 17.14,19.48 R3.2
  Bottom 0.305: v4.7,21.34 5.27,21.34 6.22,20.38 14.67,20.38 15.15,19.9 17.56,19.9 v17.75,20.09

## Text on the board
Pinguin_tBackup: 12 | 11 | SDA | Bat | EN | USB | 13 | 10 | 9 | 6 | 5 | SCL | I2C | #13 | Reset | Boot | Adafruit / RP2040 / AdaLogger / Feather | chg | Rst | 3.3V | GND | A0 | A1 | A2 | A3 | 24 | 25 | SCK | MO | MI | RX | TX | 4
Pinguin_bBackup: 3.7V/4.2V / LiPoly Battery / USB Charge | Bat | EN | USB | 13 | 12 | 11 | 10 | 9 | 6 | 5 | SCL | SDA | RP2040 + 8MB Flash / with MicroSD Card | Rst | 3.3V | GND | A0 | A1 | A2 | A3 | 24 | 25 | SCK | MO | MI | RX | TX | 4